# EAGLE board pub_sub_lower_bore (EAGLE 9.4.2)
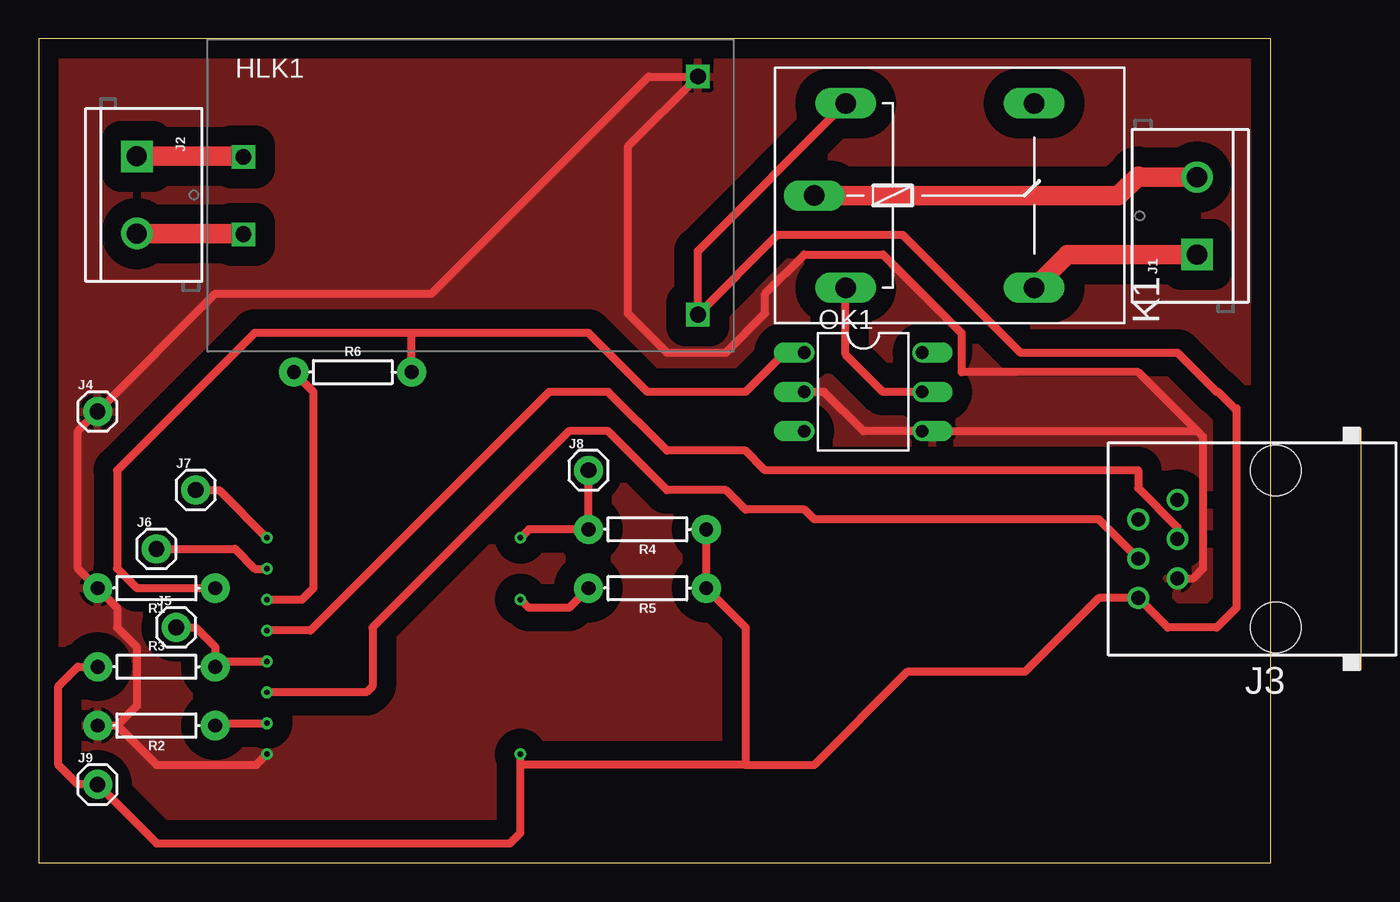
[diagram p0: board, top side]
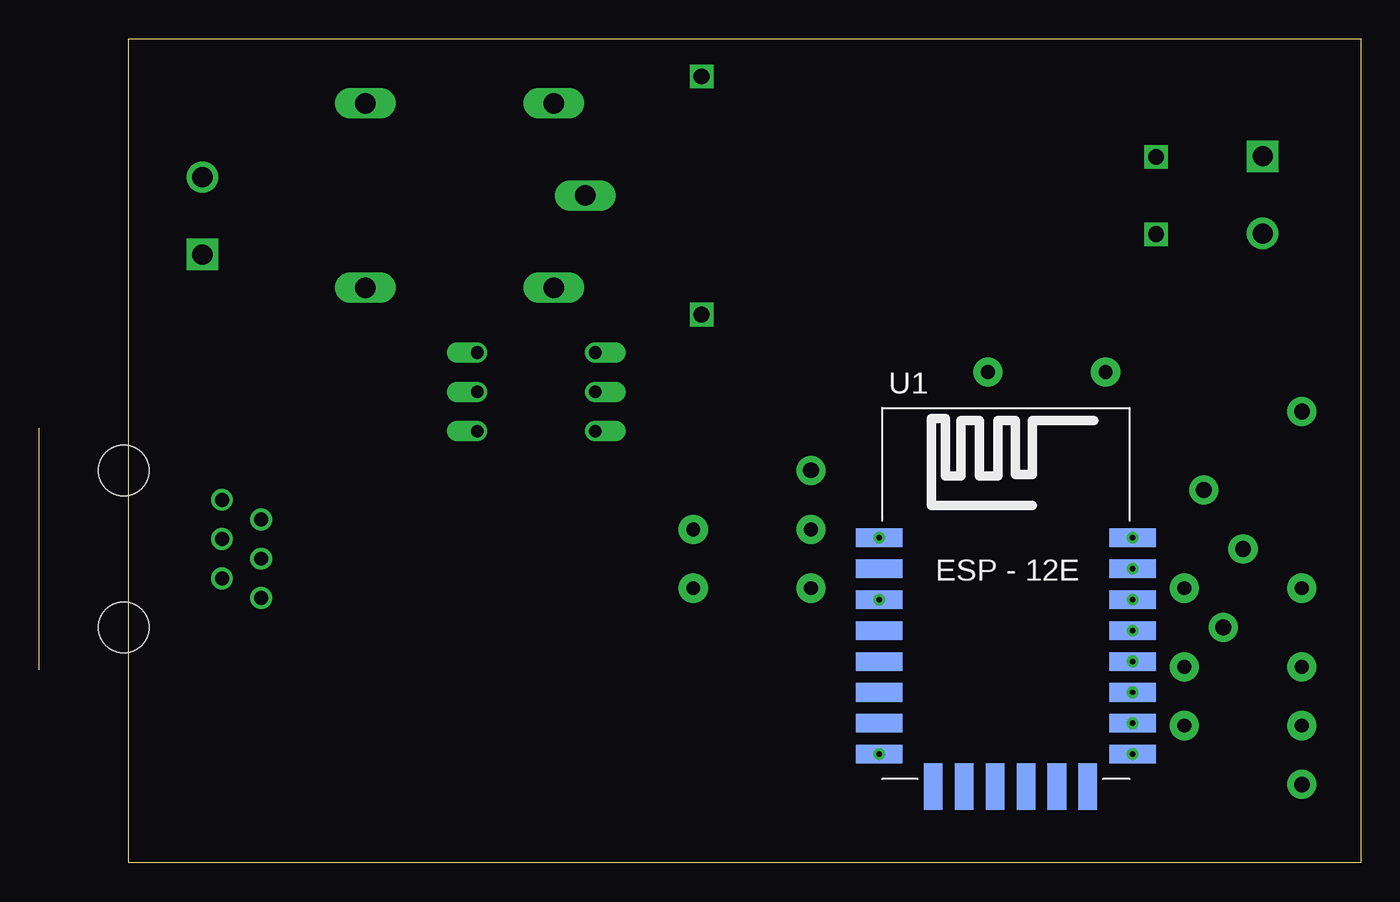
[diagram p1: board, bottom side, seen from below]

Size 79.68 x 53.33 mm. Coordinates in mm from the lower left corner, seen from the top.
Outline: 0,0 79.68,0 79.68,53.33 0,53.33 0,0
Copper layers (1*16): Top 0.035mm / dielectric 1.5mm / Bottom 0.035mm
Design rules "default": minimum track width 6mil, minimum drill 0.35mm, track to track 6mil, track to pad 6mil, pad to pad 6mil, via to via 6mil, smd to smd 6mil, copper to edge 40mil, drill to drill 6mil, minimum pad ring 10mil, minimum via ring 8mil, stop-mask expansion 4mil, vias tented up to drill 0mil, thermal gap 10mil

## Footprints (pad centres in the part's own frame; a part is rotated, then mirrored left to right if it is on the bottom)
HLK-PM01 = drill 1.016 square: P$1 -14.7,2.5; P$2 -14.7,-2.5; P$3 14.7,7.7; P$4 14.7,-7.7
SCREWTERMINAL-5MM-2 = drill 1.3 pad 2.032 square: 1 0,0 | drill 1.3 pad 2.032: 2 5,0
RJ11-NO_SHIELD = drill 0.9 pad 1.4: 1 -3.175,8.89; 2 -1.905,6.35; 3 -0.635,8.89; 4 0.635,6.35; 5 1.905,8.89; 6 3.175,6.35 | hole 3.251: -5.08,0; 5.08,0
1X01 = drill 1.016 pad 1.88: 1 0,0
G5LE = drill 1.321 long: 1 -7.493,-5.969; 2 -7.493,5.969; O 4.699,5.969; P -9.525,0; S 4.699,-5.969
DIL06 = drill 0.813 offset: 1 -2.54,-3.81; 2 0,-3.81; 3 2.54,-3.81; 4 2.54,3.81; 5 0,3.81; 6 -2.54,3.81
AXIAL-0.3 = drill 0.9 pad 1.88: P$1 -3.81,0; P$2 3.81,0
ESP12E-SMD = smd 3 x 1.2: ADC -8.3,3.8; CH_PD -8.3,1.8; GND 8.1,-8.2; GPIO0 8.1,-2.2; GPIO2 8.1,-4.2; GPIO4 8.1,-0.2; GPIO5 8.1,1.8; GPIO12 -8.3,-4.2; GPIO13 -8.3,-6.2; GPIO14 -8.3,-2.2; GPIO15 8.1,-6.2; GPIO16 -8.3,-0.2; RESET -8.3,5.8; RXD0 8.1,3.8; TXD0 8.1,5.8; VCC -8.3,-8.2 | smd 1.2 x 3: CS0 -4.8,-10.3; GPIO9 -0.8,-10.3; GPIO10 1.2,-10.3; MISO -2.8,-10.3; MOSI 3.2,-10.3; SCLK 5.2,-10.3

## Placement (x,y rotation side)
HLK1  HLK-PM013W  [HLK-PM01]  27.94,43.18 0 top
J1  [SCREWTERMINAL-5MM-2]  74.93,39.37 90 top
J2  [SCREWTERMINAL-5MM-2]  6.35,45.72 270 top
J3  RJ11-6L-B  [RJ11-NO_SHIELD]  80.01,20.32 90 top
J4  [1X01]  3.81,29.21 0 top
J5  [1X01]  8.89,15.24 0 top
J6  [1X01]  7.62,20.32 0 top
J7  [1X01]  10.16,24.13 0 top
J8  [1X01]  35.56,25.4 0 top
J9  [1X01]  3.81,5.08 0 top
K1  G5LE  [G5LE]  59.69,43.18 0 top
OK1  4N35  [DIL06]  53.34,30.48 270 top
R1  10k  [AXIAL-0.3]  7.62,17.78 180 top
R2  1k  [AXIAL-0.3]  7.62,8.89 180 top
R3  1k  [AXIAL-0.3]  7.62,12.7 0 top
R4  1k  [AXIAL-0.3]  39.37,21.59 180 top
R5  1k  [AXIAL-0.3]  39.37,17.78 180 top
R6  1k  [AXIAL-0.3]  20.32,31.75 0 top
U1  [ESP12E-SMD]  22.86,15.24 0 bottom

## Library data of the parts
HLK1 = HLK-PM01
J1 J2 = SparkFun-Connectors; SF_SKU: PRT-08432
J3 = con-tycoelectronics; MF: TYCO ELECTRONICS; MPN: RJ11-6L-B; OC_FARNELL: unknown; OC_NEWARK: 52K3613
J4-J9 = SparkFun-Connectors
K1 = relay; OC_FARNELL: unknown; OC_NEWARK: unknown
OK1 = optocoupler; MF: FAIRCHILD SEMICONDUCTOR; MPN: 4N35; OC_FARNELL: 1328375; OC_NEWARK: 72K9946
R1 = SparkFun-Resistors; PROD_ID: RES-12183
R2-R6 = SparkFun-Resistors; PROD_ID: RES-12182
U1 = esp8266modules

## Nets
+5V: HLK1.P$4 J3.1 J9.1 K1.2 R3.P$1 R4.P$1 R5.P$1 U1.VCC
GND: HLK1.P$3 J3.2 J4.1 OK1.2 OK1.4 R1.P$2 R2.P$2 U1.GND
N$1: J3.4 U1.GPIO4
N$2: OK1.1 R1.P$1 R6.P$2
N$3: R2.P$1 U1.GPIO15
N$4: J5.1 R3.P$2 U1.GPIO0
N$7: R6.P$1 U1.GPIO5
N$8: J1.1 K1.S
N$9: J1.2 K1.P
N$10: K1.1 OK1.5
N$11: HLK1.P$2 J2.2
N$12: HLK1.P$1 J2.1
N$13: J3.3 U1.GPIO2
N$14: J7.1 U1.TXD0
N$15: J6.1 U1.RXD0
N$16: J8.1 R4.P$2 U1.RESET
N$18: R5.P$2 U1.CH_PD

## Tracks (layer width: path | path; a pad name or v marks a point on that pad's centre or on a via)
+5V  (via drill 0.35)
  Top 0.508: R4.P$1 R5.P$1 45.72,15.24 45.72,6.35 | R3.P$1 2.54,12.7 1.27,11.43 1.27,6.35 2.54,5.08 J9.1 7.62,1.27 30.48,1.27 31.16,1.95 31.16,6.35 | 31.16,6.35 U1.VCC | 45.72,6.35 50.16,6.35 56.2,12.38 63.82,12.38 68.58,17.14 J3.1 73.03,15.24 76.2,15.24 77.47,16.51 77.47,29.41 77.37,29.41 76.3,30.48 76.2,30.48 73.66,33.02 63.5,33.02 55.88,40.64 47.8,40.64 HLK1.P$4 42.64,39.59 K1.2 | 45.72,6.35 31.16,6.35
  other vias: 31.16,7.04
GND  (via drill 0.35)
  Top 0.508: 5.08,8.89 6.35,10.16 6.35,13.97 5.08,15.24 5.08,16.51 R1.P$2 2.54,19.05 2.54,27.94 J4.1 11.43,36.83 25.4,36.83 39.45,50.88 HLK1.P$3 38.1,46.34 38.1,35.56 40.64,33.02 44.45,33.02 46.99,35.56 46.99,36.83 49.53,39.37 54.61,39.37 59.69,34.29 59.69,31.75 71.12,31.75 74.93,27.94 | R2.P$2 5.08,8.89 | 5.08,8.89 7.62,6.35 14.07,6.35 U1.GND | 74.93,27.94 75.31,27.56 75.31,19.05 74.68,18.41 J3.2 | 74.93,27.94 OK1.4 53.34,27.94 50.8,30.48 OK1.2
  other vias: 14.76,7.04
  pour Top (isolate 1.27): 0,53.34 80.01,53.34 80.01,0 0,0
N$1  (via drill 0.35)
  Top 0.508: J3.4 73.66,21.72 71.12,24.26 71.12,25.4 46.99,25.4 45.72,26.67 40.64,26.67 36.83,30.48 33.02,30.48 17.58,15.04 U1.GPIO4
  other vias: 14.76,15.04
N$2
  Top 0.508: R1.P$1 6.35,17.78 5.08,19.05 5.08,25.4 13.97,34.29 24.13,34.29 | 24.13,34.29 35.56,34.29 39.37,30.48 45.72,30.48 48.26,33.02 OK1.1 | R6.P$2 24.13,34.29
N$3  (via drill 0.35)
  Top 0.508: R2.P$1 11.58,9.04 U1.GPIO15
  other vias: 14.76,9.04
N$4  (via drill 0.35)
  Top 0.508: J5.1 10.16,15.24 11.43,13.97 R3.P$2 11.77,13.04 U1.GPIO0
  other vias: 14.76,13.04
N$7  (via drill 0.35)
  Top 0.508: U1.GPIO5 17.04,17.04 17.78,17.78 17.78,30.48 R6.P$1
  other vias: 14.76,17.04
N$8
  Top 1.27: K1.S 66.55,39.37 J1.1
N$9
  Top 1.27: K1.P 69.85,43.18 71.12,44.45 71.2,44.37 J1.2
N$10
  Top 0.508: OK1.5 54.61,30.48 52.2,32.89 K1.1
N$11
  Top 1.27: J2.2 13.2,40.72 HLK1.P$2
N$12
  Top 1.27: J2.1 13.2,45.72 HLK1.P$1
N$13  (via drill 0.35)
  Top 0.508: J3.3 68.58,22.23 50.16,22.23 49.53,22.86 45.72,22.86 44.45,24.13 40.64,24.13 36.83,27.94 34.29,27.94 21.59,15.24 21.59,11.43 21.2,11.04 U1.GPIO2
  other vias: 14.76,11.04
N$14  (via drill 0.35)
  Top 0.508: J7.1 11.67,24.13 U1.TXD0
  other vias: 14.76,21.04
N$15  (via drill 0.35)
  Top 0.508: J6.1 12.7,20.32 13.98,19.04 U1.RXD0
  other vias: 14.76,19.04
N$16  (via drill 0.35)
  Top 0.508: J8.1 R4.P$2 31.71,21.59 U1.RESET
  other vias: 31.16,21.04
N$18  (via drill 0.35)
  Top 0.508: R5.P$2 34.29,16.51 31.69,16.51 U1.CH_PD
  other vias: 31.16,17.04